# Altium PCB 3043-1-1532.PcbDoc (part 2 of 2)
Units mm, origin at the board's own origin, x right, y up, seen from the top; angles counter-clockwise.
Board outline 82.5 x 82.18 mm, 4 copper layers (Top Layer, Mid-Layer 1, Mid-Layer 2, Bottom Layer); 152 components, 119 nets, 487 pads, 199 vias.
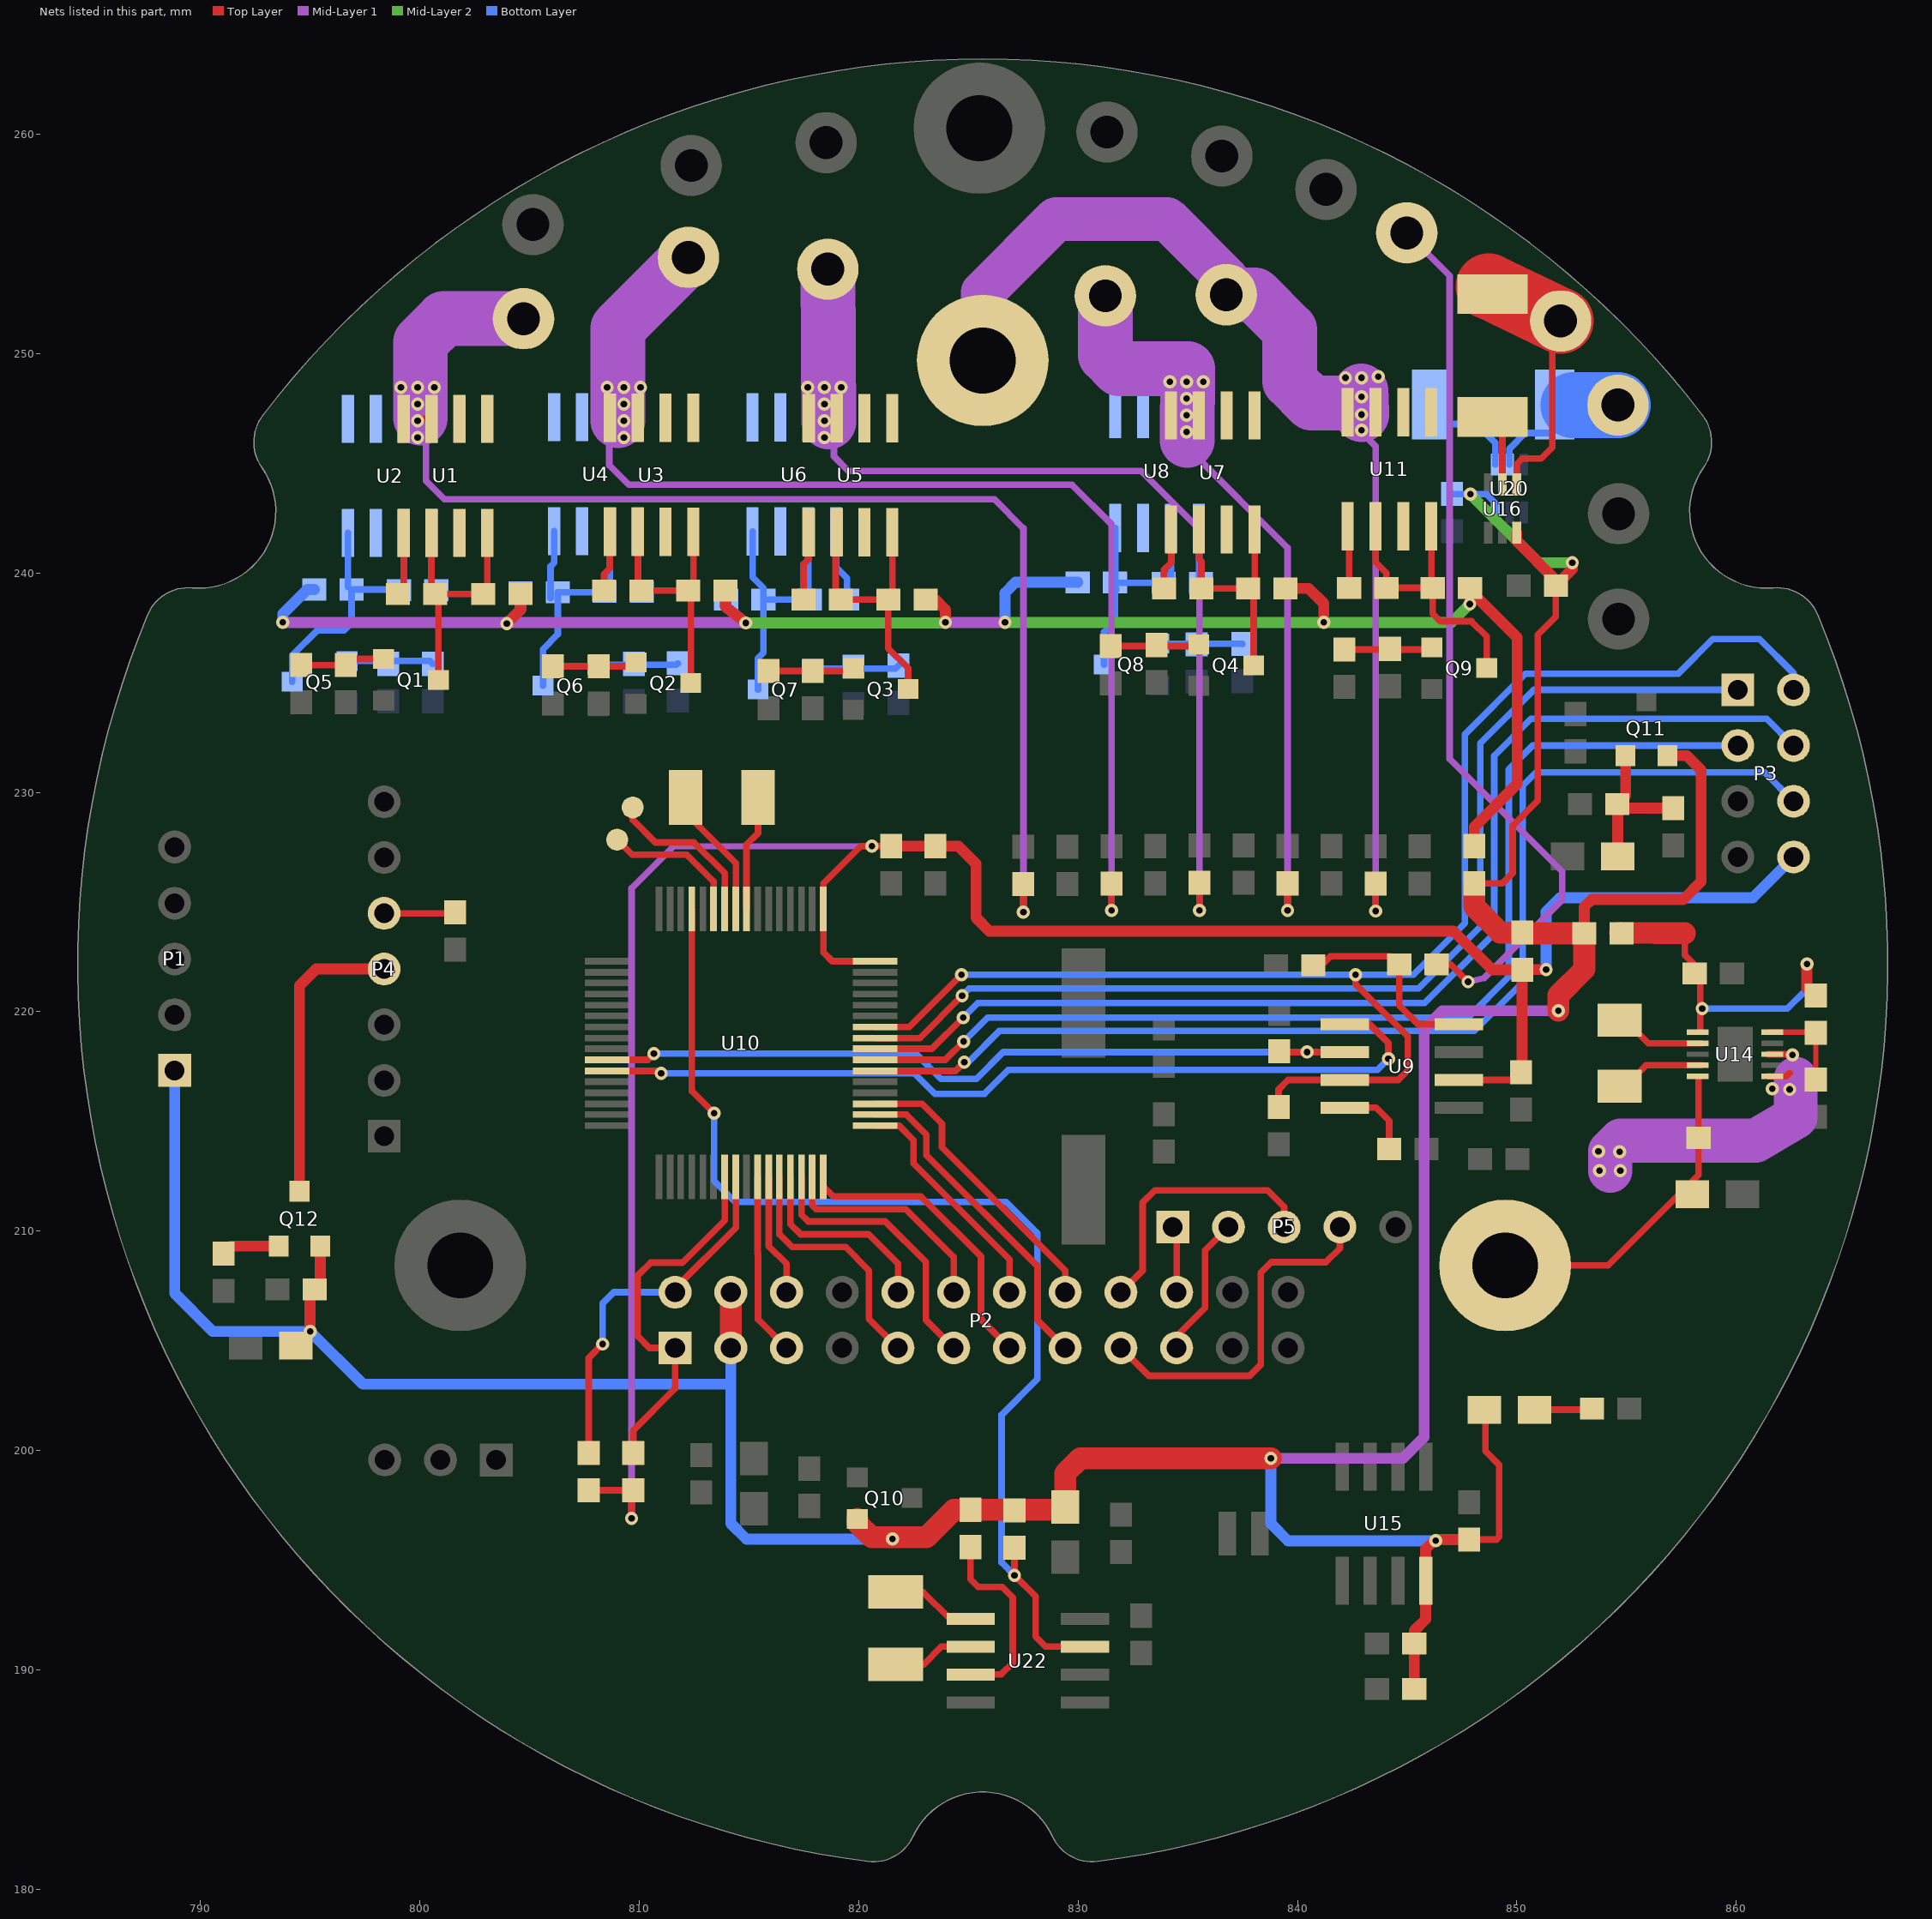
[diagram p4: the nets of this part, all layers, seen from the top]

## Via types
v1: diameter 0.6, hole 0.3, Top Layer to Bottom Layer, 199 vias

## Nets (pads, with @x,y where several pads share a name; then routed paths per layer and width w, separated by ;. In a path a pad name is that pad's centre, name@x,y a point inside that pad or via, vN(x,y) a via of type N, cw(c..) or ccw(c..) an arc to the next point about the centre after c; other vN are vias at no path point) (continued)
NetD6_2: D6.2 Q11.1 R51.1 R52.2 | length 7.4
  Top Layer w0.5: R52.2@854.569,229.464 854.954,229.848 Q11.1@854.954,231.668 ; D6.2@854.594,226.751 R52.2@854.594,229.439 ; R52.2@854.761,229.272 R51.1@857.123,229.272
NetDS1_2: DS1.2 R46.2 | length 2.6
  Top Layer w0.3: DS1.2@850.81,201.859 853.383,201.859 R46.2@853.428,201.905
NetL2_1: L2.1 U14.4 | length 3.9
  Top Layer w0.3: L2.1@854.939,216.61 855.888,217.559 U14.4@858.442,217.559
NetL2_2: L2.2 U14.2 | length 3.9
  Top Layer w0.3: L2.2@854.939,219.61 855.989,218.559 U14.2@858.442,218.559
NetP4_5: P4.5 R28.1 | length 3.2
  Top Layer w0.3: P4.5@798.37,224.485 R28.1@801.561,224.485
NetQ1_1: Q1.1 R70.1 R78.1 | length 3.9
  Top Layer w0.3: R70.1@794.588,235.8 R78.1@796.62,235.8 796.898,236.078 Q1.1@798.342,236.078
NetQ2_1: Q2.1 R71.1 R87.1 | length 3.6
  Top Layer w0.3: R71.1@806.069,235.749 Q2.1@809.672,235.749
NetQ3_1: Q3.1 R72.1 R88.1 | length 3.7
  Top Layer w0.3: R72.1@815.899,235.532 Q3.1@819.629,235.532
NetQ4_1: Q4.1 R73.1 R89.1 | length 3.9
  Top Layer w0.3: R73.1@831.494,236.664 Q4.1@835.428,236.664
NetQ5_1: Q5.1 R74.1 R90.1 | length 4
  Bottom Layer w0.3: Q5.1@796.676,235.989 800.444,235.989 R74.1@800.583,235.851
NetQ6_1: Q6.1 R75.1 R91.1 | length 3.7
  Bottom Layer w0.3: Q6.1@808.106,235.811 811.694,235.811 R75.1@811.759,235.876
NetQ7_1: Q7.1 R76.1 R92.1 | length 4
  Bottom Layer w0.3: Q7.1@817.911,235.633 821.676,235.633 R76.1@821.817,235.775
NetQ8_1: Q8.1 R77.1 R93.1 | length 3.8
  Bottom Layer w0.3: Q8.1@833.684,236.776 837.478,236.776 R77.1@837.489,236.765
NetQ9_1: Q9.1 R27.1 R32.1 | length 3.9
  Top Layer w0.3: R27.1@842.137,236.511 Q9.1@846.019,236.511
NetQ12_1: Q12.1 R45.1 | length 2.6
  Top Layer w0.5: R45.1@791.058,208.978 791.396,209.316 Q12.1@793.562,209.316
NetR1_1: R1.1 U1.1 U1.3 | length 2.9
  Top Layer w0.3: R1.1@798.996,239.039 799.262,239.305 U1.1@799.262,241.824
NetR2_2: R2.2 U2.1 U2.3 | length 2.6
  Bottom Layer w0.3: R2.2@800.532,239.268 U2.1@800.532,241.824
NetR3_2: R3.2 U1.5 U1.6 U3.5 U3.6 U5.5 U5.6 U7.5 U7.6 U11.5 U11.6 U16.5 | length 3.4
  Top Layer w0.3: U16.5@849.34,244.033 R3.2@849.34,247.406
NetR4_2: R4.2 U2.5 U2.6 U4.5 U4.6 U6.5 U6.6 U8.5 U8.6 U20.4 | length 3.2
  Bottom Layer w0.3: 847.166,246.786 848.157,246.786 849.016,245.927 U20.4@849.016,244.948
NetR6_2: R6.2 U11.1 U11.3 | length 2.7
  Top Layer w0.3: R6.2@842.354,239.319 U11.1@842.354,242.065
NetR7_2: R7.2 U3.1 U3.3 | length 2.8
  Top Layer w0.3: R7.2@808.394,239.192 808.394,239.942 808.66,240.208 U3.1@808.66,241.875
NetR10_2: R10.2 U4.1 U4.3 | length 2.8
  Bottom Layer w0.3: U4.1@809.93,241.9 809.93,239.331 R10.2@810.119,239.141
NetR11_2: R11.2 U5.1 U5.3 | length 3.2
  Top Layer w0.3: R11.2@817.487,238.785 817.487,240.399 817.728,240.64 U5.1@817.728,241.85
NetR12_2: R12.2 U6.1 U6.3 | length 3.3
  Bottom Layer w0.3: U6.1@818.972,241.891 818.972,240.259 819.467,239.764 R12.2@819.467,238.785
NetR13_2: R13.2 U7.1 U7.3 | length 2.8
  Top Layer w0.3: R13.2@833.921,239.293 833.921,240.145 834.238,240.462 U7.1@834.238,241.977
NetR14_2: R14.2 R15.1 U14.10 | length 4.3
  Top Layer w0.25: U14.10@861.442,219.059 863.601,219.059 R14.2@863.624,219.036 ; R15.1@863.625,216.902 R14.2@863.625,219.035
NetR16_2: R16.2 U8.1 U8.3 | length 2.8
  Bottom Layer w0.3: R16.2@835.508,239.282 U8.1@835.508,242.043
NetR39_2: R39.2 U9.8 | length 3.6
  Top Layer w0.3: U9.8@842.153,215.621 843.585,215.621 844.183,215.023 R39.2@844.183,213.741
NetR49_2: R49.2 U22.3 | length 8.8
  Top Layer w0.3: R49.2@825.094,195.594 825.094,194.132 825.449,193.777 826.541,193.777 827.024,193.294 827.024,190.322 826.491,189.789 U22.3@825.11,189.789
NetR55_1: R55.1 R56.2 U9.4 | length 9.2
  Top Layer w0.3: R56.2@840.726,222.123 841.096,222.123 841.502,222.529 844.259,222.529 R55.1@844.64,222.148 844.64,220.281 845.49,219.431 U9.4@847.353,219.431
NetTP1_1: TP1.1 U10.10 | length 7.4
  Top Layer w0.3: TP1.1@809.701,229.311 809.701,228.752 810.743,227.711 812.495,227.711 813.892,226.314 U10.10@813.892,224.688
NetTP2_1: TP2.1 U10.11 | length 6.5
  Top Layer w0.3: TP2.1@808.99,227.889 TP2.1@808.99,227.838 809.676,227.152 812.165,227.152 813.384,225.933 U10.11@813.384,224.688
NetU10_8: U10.8 Y3.1 | length 5.3
  Top Layer w0.3: Y3.1@814.857,229.464 Y3.1@814.883,229.438 ; U10.8@814.883,224.688 814.883,227.609 815.416,228.143 Y3.1@815.416,229.768
NetU10_9: U10.9 Y3.2 | length 6.7
  Top Layer w0.3: Y3.2@811.555,228.778 Y3.2@811.555,229.464 ; Y3.2@812.114,229.768 812.114,229.057 814.4,226.771 U10.9@814.4,224.688
NetU22_1: U22.1 Y1.2 | length 3.9
  Top Layer w0.3: Y1.2@821.69,193.548 822.935,193.548 824.154,192.329 U22.1@825.11,192.329
NetU22_2: U22.2 Y1.1 | length 3.8
  Top Layer w0.3: Y1.1@821.69,190.246 822.96,190.246 823.773,191.059 U22.2@825.11,191.059
NPFO: U9.5 U10.27 | length 39.8
  Top Layer w0.3: U10.27@808.533,217.297 810.895,217.297 v1(810.997,217.195) ; U9.5@842.153,219.431 843.28,219.431 844.144,218.567 v1(844.144,217.856)
  Bottom Layer w0.3: v1(810.997,217.195) 822.528,217.195 823.468,216.256 825.729,216.256 826.821,217.348 843.636,217.348 v1(844.144,217.856)
NRST: P3.2 R24.2 U9.7 U10.58 | length 68
  Top Layer w0.3: U10.58@820.75,219.304 822.3,219.304 v1(824.687,221.691) ; R24.2@839.14,215.658 839.14,216.459 839.572,216.891 844.601,216.891 845.033,217.322 845.033,218.872 842.645,221.259 v1(842.645,221.691)
  Bottom Layer w0.3: v1(824.687,221.691) 845.287,221.691 847.623,224.028 847.623,232.639 850.392,235.407 857.352,235.407 858.926,236.982 861.06,236.982 862.609,235.433 P3.2@862.609,234.671
RHYTHM_CS0: P2.9 U10.44 | length 11.5
  Top Layer w0.3: U10.44@816.381,212.471 816.381,209.855 816.966,209.271 819.404,209.271 820.471,208.204 820.471,205.994 P2.9@821.792,204.673
RHYTHM_CS1: P2.10 U10.45 | length 9.1
  Top Layer w0.3: U10.45@816.889,212.471 816.889,210.312 817.347,209.855 820.445,209.855 821.792,208.509 P2.10@821.792,207.213
RHYTHM_CS2: P2.11 U10.46 | length 12.7
  Top Layer w0.3: U10.46@817.397,212.471 817.397,210.744 817.702,210.439 821.207,210.439 823.062,208.585 823.062,205.943 P2.11@824.332,204.673
RHYTHM_CS3: P2.12 U10.47 | length 10.3
  Top Layer w0.3: U10.47@817.88,212.471 817.88,211.176 818.058,210.998 822.147,210.998 824.332,208.813 P2.12@824.332,207.213
RHYTHM_CS4: P2.13 U10.48 | length 13.6
  Top Layer w0.3: U10.48@818.388,212.471 818.388,212.039 818.845,211.582 822.833,211.582 825.576,208.839 825.576,205.969 P2.13@826.872,204.673
RHYTHM_CS5: P2.14 U10.49 | length 10.8
  Top Layer w0.3: U10.49@820.75,214.808 821.842,214.808 822.503,214.147 822.503,213.081 826.872,208.712 P2.14@826.872,207.213
RHYTHM_CS6: P2.15 U10.50 | length 15.1
  Top Layer w0.3: U10.50@820.75,215.316 822.173,215.316 823.087,214.401 823.087,213.462 828.142,208.407 828.142,205.943 P2.15@829.412,204.673
RHYTHM_CS7: P2.16 U10.51 | length 13.4
  Top Layer w0.3: U10.51@820.75,215.798 822.884,215.798 823.798,214.884 823.798,213.817 829.412,208.204 P2.16@829.412,207.213
S1_1: Q1.3 R1.2 R17.1 U1.2 U1.4 | length 11.9
  Top Layer w0.3: U1.2@800.532,241.824 800.532,239.407 800.848,239.09 Q1.3@800.848,235.134 ; R1.2@800.696,239.039 R17.1@802.882,239.039 803.072,239.229 U1.4@803.072,241.824
S1_2: Q2.3 R7.1 R18.1 U3.2 U3.4 | length 11.8
  Top Layer w0.3: U3.2@809.93,241.875 809.93,239.356 R7.1@810.094,239.192 R18.1@812.229,239.192 812.47,239.432 U3.4@812.47,241.875 ; Q2.3@812.348,234.975 R18.1@812.348,239.073
S1_3: Q3.3 R11.1 R19.1 U5.2 U5.4 | length 13.2
  Top Layer w0.3: U5.2@818.947,242.113 818.947,239.026 R11.1@819.187,238.785 R19.1@821.348,238.785 ; U5.4@821.538,241.85 821.538,238.975 R19.1@821.348,238.785 ; Q3.3@822.254,234.708 822.254,235.656 821.348,236.562 R19.1@821.348,238.785
S1_4: Q4.3 R13.1 R20.1 U7.2 U7.4 | length 11.4
  Top Layer w0.3: U7.2@835.508,242.027 835.508,240.64 835.621,240.526 R13.1@835.621,239.293 R20.1@837.833,239.293 ; Q4.3@838.002,235.788 838.002,239.124 R20.1@837.833,239.293 ; U7.4@838.048,242.027 838.048,239.508 R20.1@837.833,239.293
S1_5: Q9.3 R6.1 R26.1 U11.2 U11.4 | length 13.4
  Top Layer w0.3: U11.2@843.559,242.129 843.559,240.487 844.054,239.993 R6.1@844.054,239.319 R26.1@846.164,239.319 846.164,238.137 846.506,237.795 847.928,237.795 848.619,237.104 Q9.3@848.619,235.661 ; R26.1@846.099,239.383 U11.4@846.099,242.129
S2_1: Q5.3 R2.1 R21.1 U2.2 U2.4 | length 13.3
  Bottom Layer w0.3: Q5.3@794.176,235.039 794.176,236.24 795.325,237.388 796.544,237.388 796.886,237.73 R21.1@796.886,239.243 R2.1@799.021,239.243 ; R21.1@796.722,239.356 U2.4@796.722,241.824 ; R2.1@799.047,239.217 799.262,239.432 U2.2@799.262,241.824
S2_2: Q6.3 R10.1 R22.1 U4.2 U4.4 | length 12.6
  Bottom Layer w0.3: Q6.3@805.606,234.861 805.606,236.519 806.284,237.197 R22.1@806.284,239.116 R10.1@808.394,239.116 ; R22.1@805.956,238.848 805.956,240.298 806.12,240.462 U4.4@806.12,241.9 ; R10.1@808.419,239.141 808.66,239.381 U4.2@808.66,241.9
S2_3: Q7.3 R12.1 R23.1 U6.2 U6.4 | length 12.7
  Bottom Layer w0.3: U6.4@815.162,241.891 815.162,239.801 815.657,239.307 815.657,236.359 815.411,236.113 Q7.3@815.411,234.683 ; R23.1@815.657,238.785 R12.1@817.767,238.785 ; R12.1@817.702,238.85 U6.2@817.702,241.891
S2_4: Q8.3 R16.1 R36.1 U8.2 U8.4 | length 11.9
  Bottom Layer w0.3: Q8.3@831.184,235.826 831.184,237.307 831.684,237.807 R36.1@831.684,239.573 ; R36.1@831.557,239.268 R36.1@831.582,239.243 ; R36.1@831.698,239.307 U8.4@831.698,242.043 ; R36.1@831.709,239.547 R16.1@833.896,239.547 ; R36.1@831.737,239.229 R36.1@831.737,239.268 ; R16.1@833.769,239.243 834.238,239.712 U8.2@834.238,242.043
SIM_CLK: P2.17 P5.4 | length 16.7
  Top Layer w0.3: P2.17@832.333,204.673 P2.17@831.952,204.673 833.222,203.403 837.819,203.403 838.327,203.911 838.327,208.102 838.81,208.585 841.299,208.585 841.934,209.22 P5.4@841.934,210.185
SIM_IO: P2.18 P5.3 | length 13
  Top Layer w0.3: P2.18@831.952,207.823 P2.18@831.952,207.213 832.942,208.204 832.942,211.303 833.501,211.861 838.632,211.861 839.394,211.099 P5.3@839.394,210.185
SIM_RST: P2.20 P5.1 | length 3.6
  Top Layer w0.3: P5.1@834.314,210.185 834.492,210.007 P2.20@834.492,207.213 P2.20@835,207.213
SIM_VCC: P2.19 P5.2 | length 6.5
  Top Layer w0.3: P2.19@834.492,204.673 834.492,205.207 835.787,206.502 835.787,209.118 P5.2@836.854,210.185
SQW_OUT: R48.2 U10.13 U22.7 | length 51.9
  Top Layer w0.3: U10.13@812.394,224.688 812.394,216.383 v1(813.41,215.367) ; R48.2@827.1,195.568 v1(827.1,194.31) 828.065,193.345 828.065,191.516 828.523,191.059 U22.7@830.31,191.059
  Bottom Layer w0.3: v1(813.41,215.367) 813.41,212.293 814.375,211.328 826.719,211.328 828.142,209.906 828.142,203.251 826.516,201.625 826.516,194.894 v1(827.1,194.31)
SW0: P2.5 U10.42 | length 8.3
  Top Layer w0.3: U10.42@815.391,212.471 815.391,208.991 815.416,208.966 815.416,205.969 P2.5@816.712,204.673
SW1: P2.6 U10.43 | length 5.6
  Top Layer w0.3: U10.43@815.899,212.471 815.899,209.321 816.712,208.509 P2.6@816.712,207.213
SW2: P2.1 R33.2 U10.39 | length 17.3
  Top Layer w0.3: R33.2@809.727,199.884 809.727,200.914 811.632,202.819 P2.1@811.632,204.673 810.463,204.673 809.93,205.207 809.93,207.975 810.514,208.559 811.962,208.559 813.892,210.49 U10.39@813.892,212.471
SW3: P2.2 R30.2 U10.40 | length 17
  Top Layer w0.3: R30.2@807.695,199.884 807.695,204.216 v1(808.33,204.851) ; P2.2@811.632,207.213 811.632,207.391 814.4,210.16 U10.40@814.4,212.471
  Bottom Layer w0.3: v1(808.33,204.851) 808.33,206.705 808.838,207.213 P2.2@811.632,207.213
TCK: P3.1 U10.57 | length 50.8
  Top Layer w0.3: U10.57@820.75,218.796 822.782,218.796 v1(824.713,220.726)
  Bottom Layer w0.3: v1(824.713,220.726) 825.043,221.056 845.515,221.056 848.335,223.876 848.335,232.232 850.773,234.671 P3.1@860.069,234.671
TDI: P3.3 U10.55 | length 50.8
  Top Layer w0.3: U10.55@820.75,217.805 823.951,217.805 v1(824.789,218.643)
  Bottom Layer w0.3: v1(824.789,218.643) 825.881,219.735 847.776,219.735 849.63,221.59 849.63,231.038 850.722,232.131 P3.3@860.069,232.131
TDO: P3.6 U10.54 | length 53.3
  Top Layer w0.3: U10.54@820.75,217.297 824.408,217.297 v1(824.814,217.703)
  Bottom Layer w0.3: v1(824.814,217.703) 824.992,217.703 826.414,219.126 848.055,219.126 850.265,221.336 850.265,230.302 850.875,230.911 861.289,230.911 P3.6@862.609,229.591
TMS: P3.4 U10.56 | length 53.3
  Top Layer w0.3: U10.56@820.75,218.313 823.341,218.313 v1(824.763,219.735)
  Bottom Layer w0.3: v1(824.763,219.735) 825.424,220.396 845.795,220.396 848.97,223.571 848.97,231.673 850.646,233.35 861.39,233.35 P3.4@862.609,232.131
V_BT1: B1+.1 R9.1 U1.7 U1.8 U2.7 U2.8 | length 58.2
  Top Layer w0.3: v1(799.897,246.939) 799.982,247.024 U1.7@800.532,247.024 ; v1(827.507,224.536) R9.1@827.507,225.82
  Mid-Layer 1 w0.3: 800.278,246.253 800.278,244.196 801.116,243.357 826.186,243.357 827.507,242.037 v1(827.507,224.536)
  Mid-Layer 1 w2.5: v1@800.024,247.066 800.024,250.52 801.091,251.587 B1+.1@804.723,251.587
  other v1: 799.897,246.177 799.897,247.701 799.135,248.463 799.897,248.463 800.659,248.463
V_BT2: B2+.1 R29.1 U3.7 U3.8 U4.7 U4.8 | length 52.9
  Top Layer w0.3: v1(831.52,224.612) R29.1@831.52,225.831
  Mid-Layer 1 w0.3: 808.634,246.228 808.634,244.907 809.523,244.018 829.716,244.018 831.52,242.214 v1(831.52,224.612)
  Mid-Layer 1 w2.5: v1@809.015,246.939 809.015,251.155 B2+.1@812.241,254.381
  other v1: 809.295,246.177 809.295,246.939 809.295,247.701 808.533,248.463 809.295,248.463 810.057,248.463
V_BT3: B3+.1 R34.1 U5.7 U5.8 U6.7 U6.8 | length 44.2
  Top Layer w0.3: v1(835.533,224.612) R34.1@835.533,225.87
  Mid-Layer 1 w0.3: 818.871,245.923 818.871,245.313 819.531,244.653 832.866,244.653 835.533,241.986 v1(835.533,224.612)
  Mid-Layer 1 w2.5: B3+.1@818.591,253.848 v1@818.642,246.888
  other v1: 818.439,246.177 818.439,246.939 818.439,247.701 817.677,248.463 818.439,248.463 819.201,248.463
V_BT4: B4+.1 R40.1 U7.7 U7.8 U8.7 U8.8 | length 33.9
  Top Layer w0.3: v1(839.546,224.612) R40.1@839.546,225.845
  Mid-Layer 1 w0.3: 835.177,245.516 839.546,241.148 v1(839.546,224.612)
  Mid-Layer 1 w2.5: B4+.1@831.24,252.628 831.24,249.936 831.875,249.301 835,249.301 834.974,246.05
  other v1: 834.949,246.431 834.949,247.193 834.949,247.955 834.187,248.717 834.949,248.717 835.711,248.717
V_BT5: B5+.1 R42.1 U11.7 U11.8 V_IN.1 | length 51.1
  Top Layer w0.3: v1(843.559,224.587) R42.1@843.559,225.831
  Mid-Layer 1 w0.3: 843.153,246.177 843.559,245.77 v1(843.559,224.587)
  Mid-Layer 1 w2: V_IN.1@825.653,249.681 825.653,252.782 829.005,256.134 834.06,256.134 836.752,253.441 B5+.1@836.752,252.679
  Mid-Layer 1 w2.5: B5+.1@836.752,252.679 838.048,252.679 839.648,251.079 839.648,248.742 840.638,247.752 v1@842.899,247.752 ; v1@842.899,248.285 842.905,248.031 v1(842.924,247.218)
  other v1: 842.924,246.507 842.924,248.031 842.188,248.895 842.924,248.895 843.686,248.945
V_GPS: P4.4 Q12.3 | length 13.5
  Top Layer w0.5: Q12.3@794.512,211.816 794.512,221.183 795.274,221.945 P4.4@798.37,221.945
VCC_2V8: C1.2 C2.2 C9.1 D3.1 D4.2 DS1.1 P1.1 P2.3 P2.4 Q10.2 Q11.2 Q12.2 R8.2 R38.2 R44.2 R48.1 R49.1 R57.2 R58.1 R67.2 U15.8 U16.3 U20.3 | length 195.2
  Top Layer w0.3: C9.1@847.827,195.94 849.075,195.94 849.198,196.063 849.198,199.339 848.563,199.974 DS1.1@848.563,202.082 ; R58.1@848.055,225.845 849.339,225.845 849.808,226.314 849.808,228.473 850.951,229.616 850.951,237.185 851.775,238.01 C1.2@851.775,239.42
  Top Layer w0.5: D4.2@794.346,204.78 v1(794.995,205.429) 794.995,207.239 795.462,207.706 Q12.2@795.462,209.316 ; P2.3@814.172,204.267 P2.3@814.172,204.673 ; R67.2@845.324,189.128 845.324,191.782 845.845,192.303 845.845,195.504 846.281,195.94 C9.1@847.827,195.94 ; U16.3@849.99,241.833 849.99,241.448 C1.2@851.775,239.663 ; C1.2@851.775,239.42 852.526,240.171 v1(852.526,240.462) ; R57.2@853.073,223.571 853.073,224.778 853.415,225.12 857.58,225.12 858.393,225.933 858.393,231.013 857.738,231.668 Q11.2@856.854,231.668
  Top Layer w1: P2.3@814.172,204.673 P2.4@814.172,207.213 ; Q10.2@819.932,196.878 819.932,196.703 820.598,196.037 823.087,196.037 824.343,197.294 D3.1@829.288,197.294 ; D3.1@829.417,197.423 829.417,198.963 830.097,199.644 v1@838.798,199.644 ; R58.1@848.055,225.845 848.055,224.79 849.237,223.608 R8.2@850.24,223.608 ; R8.2@850.277,223.571 R57.2@853.073,223.571 853.073,221.933 851.891,220.751 v1(851.891,220.04)
  Mid-Layer 1 w0.5: v1(838.784,199.644) 844.804,199.644 845.769,200.609 845.769,219.202 846.607,220.04 v1(851.891,220.04)
  Mid-Layer 2 w0.5: v1(847.877,243.586) 851.002,240.462 v1(852.526,240.462)
  Bottom Layer w0.3: C2.2@847.039,243.598 848.602,243.598 849.016,243.184 U20.3@849.016,242.748
  Bottom Layer w0.5: P1.1@788.822,217.322 788.822,207.162 790.556,205.429 v1(794.995,205.429) 797.401,203.022 814.146,203.022 ; P2.3@814.172,204.673 814.172,196.672 814.883,195.961 v1(821.538,195.961) ; v1(838.784,199.644) 838.784,196.672 839.572,195.885 v1(846.303,195.885)
VCC_BAT: R4.1 U20.5 V.1 | length 4.9
  Bottom Layer w0.3: U20.5@849.666,244.948 849.666,245.654 850.392,246.38 R4.1@851.484,246.38
  Bottom Layer w3: R4.1@852.576,247.65 V.1@854.608,247.65
VCC_CHARGE: R3.1 S+.1 U16.4 | length 15.8
  Top Layer w0.3: R3.1@848.893,252.711 850.919,252.711 851.611,252.019 851.611,245.72 851.103,245.212 850.24,245.212 849.99,244.962 U16.4@849.99,244.033
  Top Layer w3: R3.1@848.716,253.06 S+.1@851.992,251.485
VCC_MCU: C11.1 C12.1 P3.8 R8.1 R30.1 R33.1 R35.2 U9.2 U10.1 U10.64 | length 109.4
  Top Layer w0.3: R30.1@807.695,198.184 R33.1@809.727,198.184 809.65,198.108 v1(809.65,196.901) ; U10.64@820.75,222.301 818.794,222.301 818.388,222.707 818.388,225.843 820.09,227.545 C12.1@821.487,227.545 ; U9.2@847.353,216.891 849.847,216.891 R35.2@850.189,217.233
  Top Layer w0.5: C12.1@821.487,227.545 C11.1@823.493,227.545 824.535,227.545 825.348,226.732 825.348,224.282 825.957,223.672 847.115,223.672 848.88,221.908 850.24,221.915 v1(851.332,221.92) ; R35.2@850.24,217.283 R8.1@850.24,221.908
  Mid-Layer 1 w0.3: v1(809.65,196.901) 809.65,225.628 811.555,227.533 v1(820.598,227.545)
  Bottom Layer w0.5: v1(851.332,221.92) 851.332,224.561 851.967,225.196 860.755,225.196 P3.8@862.609,227.051
VCC_MNG: C5.1 D1.2 U14.5 U14.6 U14.8 VMNG.1 | length 28.3
  Top Layer w0.3: VMNG.1@849.469,208.432 854.15,208.432 858.278,212.559 858.278,216.895 ; U14.6@861.442,217.059 862.289,217.059 862.432,217.202 ; U14.8@861.442,218.059 862.217,218.059
  Mid-Layer 1 w2: 854.253,212.75 854.253,213.639 854.735,214.121 860.881,214.121 862.711,215.189 862.711,216.941
  other v1: 853.77,212.75 854.71,212.75 854.685,213.614 853.719,213.639 862.432,216.459 861.644,216.484 862.559,218.034
VCC_OUT: C22.1 R14.1 R57.1 U14.1 | length 15.1
  Top Layer w0.3: 857.656,223.571 857.656,222.58 858.356,221.881 U14.1@858.356,219.146
  Top Layer w0.5: R14.1@863.218,221.067 v1(863.218,222.175)
  Top Layer w1: R57.1@854.71,223.596 854.773,223.596 857.656,223.571
  Bottom Layer w0.3: v1(858.444,220.142) 862.33,220.142 863.218,221.029 v1(863.218,222.175)
VCC_SOLAR: R55.2 TRRR.1 | length 40.9
  Top Layer w0.3: R55.2@846.34,222.148 846.988,222.148 v1(847.776,221.361)
  Mid-Layer 1 w0.3: TRRR.1@844.982,255.499 846.938,253.543 846.938,231.521 852.068,226.39 852.068,225.095 848.512,221.539 v1(847.776,221.361)
VCC_TH: R17.2 R18.2 R19.2 R20.2 R21.2 R22.2 R23.2 R26.2 R36.2 R58.2 | length 86.9
  Top Layer w0.5: v1(803.961,237.693) 804.582,238.315 R17.2@804.582,239.039 ; R18.2@813.929,239.192 813.929,238.469 v1(814.857,237.719) ; R19.2@823.048,238.785 823.493,238.785 823.951,238.328 v1(823.951,237.744) ; R20.2@839.456,239.293 840.511,239.293 841.197,238.608 v1(841.197,237.744) ; v1@847.864,238.594 R26.2@847.864,239.319 ; R26.2@847.864,239.205 850.011,237.058 850.011,230.378 848.055,228.422 R58.2@848.055,227.545
  Mid-Layer 1 w0.5: v1(793.75,237.744) v1@814.832,237.744 ; v1(823.951,237.744) v1(826.668,237.744)
  Mid-Layer 2 w0.5: v1(814.857,237.719) v1@823.925,237.719 ; v1(826.668,237.744) 847.014,237.744 v1(847.852,238.582)
  Bottom Layer w0.5: v1(793.75,237.744) 793.75,238.125 794.868,239.243 R21.2@795.186,239.243 ; v1(803.961,237.693) 804.584,238.316 R22.2@804.584,239.116 ; R23.2@813.957,238.785 813.957,238.442 v1(814.857,237.719) ; v1(826.668,237.744) 826.668,239.09 827.151,239.573 R36.2@829.984,239.573
WDT: R43.2 U9.6 U10.26 | length 36.3
  Top Layer w0.3: U10.26@808.533,217.805 810.387,217.805 v1(810.666,218.084) ; R43.2@838.798,218.2 R43.2@839.165,218.2 ; R43.2@839.204,218.161 U9.6@842.153,218.161
  Bottom Layer w0.3: v1(810.666,218.084) 822.604,218.084 823.747,216.941 825.373,216.941 826.592,218.161 v1(840.435,218.161)
pads on no net: P2.23 P2.24 P3.7 U10.7 U10.12 U10.25 U10.30 U10.31 U10.38 U10.59

## Polygon pours and split planes (outlines as drawn)
GND on Top Layer (solid, remove dead copper): 783.895,263.652 867.359,263.652 867.359,180.01 783.539,180.01 783.539,263.652
VCC_MNG on Top Layer (solid, remove dead copper): 847.369,206.223 853.77,206.223 853.77,207.442 858.571,207.442 858.571,211.379 858.749,211.379 858.749,217.119 857.987,217.119 856.031,215.163 852.678,215.163 853.745,215.214 852.475,215.214 852.475,215.163 852.424,215.163 852.424,213.563 847.369,208.509
VCC_MNG on Top Layer (solid, remove dead copper): 861.263,218.301 861.263,216.281 861.494,216.065 862.733,216.065 862.733,218.247 861.263,218.247
VCC_OUT on Top Layer (solid, remove dead copper): 858.647,218.948 858.647,224.231 855.98,224.231 855.98,221.056 858.037,218.999 858.622,218.999
GND on Top Layer (solid, remove dead copper): 859.257,211.455 859.257,224.46 862.254,224.46 862.254,219.685 860.857,219.685 860.679,219.507 860.679,216.027 860.984,215.722 863.752,215.722 863.752,213.309 861.924,211.48 859.231,211.48
NetL2_2 on Top Layer (solid, remove dead copper): 852.881,218.364 857.428,218.364 857.555,218.491 857.555,218.618 855.828,220.345 852.932,220.345 852.932,218.364
NetL2_1 on Top Layer (solid, remove dead copper): 852.78,217.983 857.25,217.983 857.58,217.653 857.58,217.475 857.377,217.475 857.275,217.373 855.802,215.9 852.881,215.9 852.881,217.983
V_BT1 on Top Layer (solid, remove dead copper): 798.964,245.948 800.913,245.948 800.913,248.971 798.855,248.971 798.855,245.948
V_BT2 on Top Layer (solid, remove dead copper): 808.362,245.948 810.311,245.948 810.311,248.971 808.253,248.971 808.253,245.948
V_BT3 on Top Layer (solid, remove dead copper): 817.506,245.948 819.455,245.948 819.455,248.971 817.397,248.971 817.397,245.948
V_BT4 on Top Layer (solid, remove dead copper): 834.016,246.202 835.965,246.202 835.965,249.225 833.907,249.225 833.907,246.202
NetR1_1 on Top Layer (solid, remove dead copper): 798.928,240.843 802.437,240.843 802.437,245.415 798.119,245.415 798.119,240.843
NetR7_2 on Top Layer (solid, remove dead copper): 808.12,240.843 811.835,240.843 811.835,245.415 807.263,245.415 807.263,240.843
NetR11_2 on Top Layer (solid, remove dead copper): 817.264,240.843 820.979,240.843 820.979,245.415 816.407,245.415 816.407,240.843
NetR13_2 on Top Layer (solid, remove dead copper): 833.774,241.097 837.489,241.097 837.489,245.669 832.917,245.669 832.917,241.097
V_BT5 on Top Layer (solid, remove dead copper): 842.042,246.253 843.991,246.253 843.991,249.276 841.934,249.276 841.934,246.253
NetR6_2 on Top Layer (solid, remove dead copper): 841.623,240.944 845.337,240.944 845.337,245.516 840.765,245.516 840.765,240.944
NetR3_2 on Top Layer (solid, remove dead copper): 801.522,245.974 821.639,245.974 822.909,244.704 831.85,244.704 831.85,246.253 846.48,246.253 846.48,246.507 850.519,246.507 850.519,249.428 846.48,249.428 846.48,252.298 846.455,252.298 846.455,252.349 846.125,252.349 846.125,252.298 801.522,252.298
GND on Mid-Layer 2 (solid, remove dead copper): 783.539,263.881 867.562,263.881 867.562,180.492 783.692,180.492 783.692,263.881
GND on Bottom Layer (solid, remove dead copper): 783.869,263.982 867.512,263.982 867.512,180.67 783.717,180.67 783.717,263.652
V_BT1 on Bottom Layer (solid, remove dead copper): 798.964,245.948 800.913,245.948 800.913,248.971 798.855,248.971 798.855,245.948
V_BT2 on Bottom Layer (solid, remove dead copper): 808.362,245.948 810.311,245.948 810.311,248.971 808.253,248.971 808.253,245.948
V_BT3 on Bottom Layer (solid, remove dead copper): 817.506,245.948 819.455,245.948 819.455,248.971 817.397,248.971 817.397,245.948
V_BT4 on Bottom Layer (solid, remove dead copper): 834.016,246.202 835.965,246.202 835.965,249.225 833.907,249.225 833.907,246.202
NetR2_2 on Bottom Layer (solid, remove dead copper): 798.42,240.589 801.929,240.589 801.929,245.161 797.611,245.161 797.611,240.589
NetR10_2 on Bottom Layer (solid, remove dead copper): 807.818,240.843 811.327,240.843 811.327,245.415 807.009,245.415 807.009,240.843
NetR12_2 on Bottom Layer (solid, remove dead copper): 816.708,240.843 820.217,240.843 820.217,245.415 815.899,245.415 815.899,240.843
NetR16_2 on Bottom Layer (solid, remove dead copper): 833.218,240.843 836.727,240.843 836.727,245.415 832.409,245.415 832.409,240.843
NetR4_2 on Bottom Layer (solid, remove dead copper): 794.893,245.974 821.004,245.974 821.004,242.951 830.885,242.951 830.885,246.151 848.36,246.151 848.36,252.755 794.817,252.755 794.817,245.923

## Keep-outs
Keep-Out Layer:
  the board outline again, w0.127

## Silkscreen, mask and mechanical layers (free items; w line width, h text height)
Top Overlay:
  rectangle: 803.529,188.763 819.709,192.176
  lines w0.127: 796.341,214.325 798.37,214.325 ; 798.37,212.347 798.37,214.325 ; 800.151,214.325 798.37,214.325 ; 832.383,210.185 834.314,210.185 834.288,212.039
  text "G  I  C  D  V" at 791.794,228.321 h1 r270
  text "PN:3043-1-1532" at 801.014,194.615 h1
  text "Rev:3.10" at 800.964,192.761 h1
  text "SN:" at 801.065,190.398 h1
Mechanical 1:
  circle w0.127: c801.837,208.432 r1.5
  circle w0.127: c837.028,204.679 r0.5
  circle w0.127: c834.488,204.679 r0.5
  circle w0.127: c816.708,204.679 r0.5
  circle w0.127: c819.248,204.679 r0.5
  circle w0.127: c821.788,204.679 r0.5
  circle w0.127: c824.328,204.679 r0.5
  circle w0.127: c826.868,204.679 r0.5
  circle w0.127: c829.408,204.679 r0.5
  circle w0.127: c831.948,204.679 r0.5
  circle w0.127: c831.948,207.219 r0.5
  circle w0.127: c829.408,207.219 r0.5
  circle w0.127: c826.868,207.219 r0.5
  circle w0.127: c824.328,207.219 r0.5
  circle w0.127: c821.788,207.219 r0.5
  circle w0.127: c819.248,207.219 r0.5
  circle w0.127: c816.708,207.219 r0.5
  circle w0.127: c814.168,204.679 r0.5
  circle w0.127: c814.168,207.219 r0.5
  circle w0.127: c834.488,207.219 r0.5
  circle w0.127: c837.028,207.219 r0.5
  circle w0.127: c849.469,208.431 r1.5
  circle w0.127: c825.653,249.681 r1.5
  circle w0.127: c825.653,249.681 r3
  circle w0.127: c801.837,208.432 r3
  circle w0.127: c849.469,208.432 r3
  lines w0.127: 812.898,203.409 812.898,208.439 838.298,208.439 838.298,203.409 812.898,203.409

## Text inside footprints (layer, text, board x,y; h text height)
P2: Top Overlay "1" at 809.092,204.165 h1.27; Top Overlay "2" at 809.092,206.705 h1.27; Top Overlay "23" at 841.096,204.165 h1.27; Top Overlay "24" at 841.096,206.705 h1.27
P3: Top Overlay "2" at 862.101,237.211 h1.27 r270; Top Overlay "1" at 859.561,236.703 h1.27 r270; Top Overlay "7" at 859.561,225.527 h1.27 r270; Top Overlay "8" at 862.101,225.527 h1.27 r270